# Altium PCB CSP - potentiometers.PcbDoc
Units mm, origin at the board's own origin, x right, y up, seen from the top; angles counter-clockwise.
Board outline 39.12 x 36.32 mm, 2 copper layers (Top Layer, Bottom Layer); 38 components, 22 nets, 85 pads, 0 vias.
Unrouted connection lines stored in the file: 1.
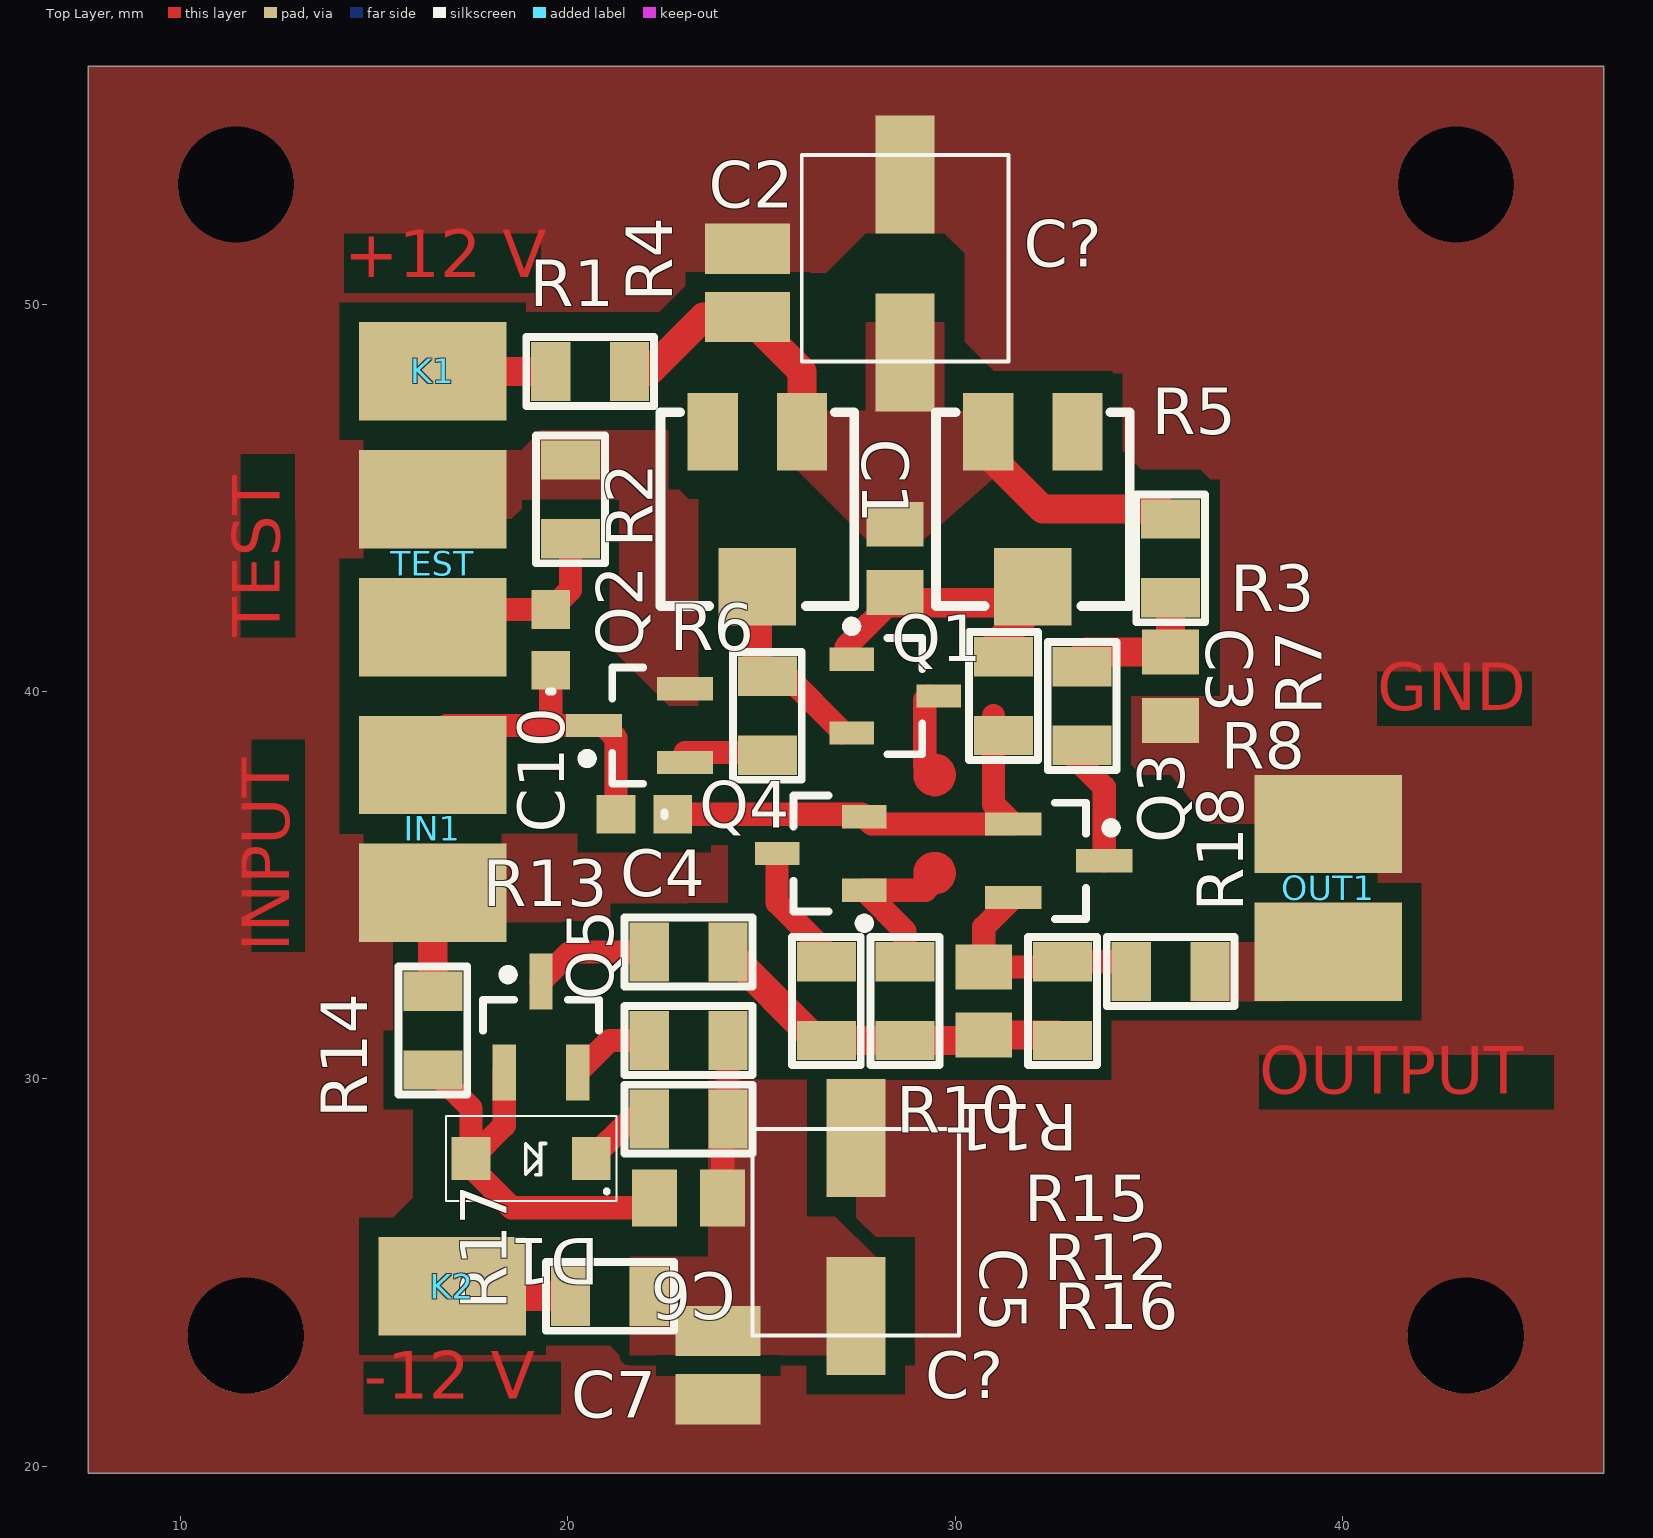
[diagram p0: Top Layer view]
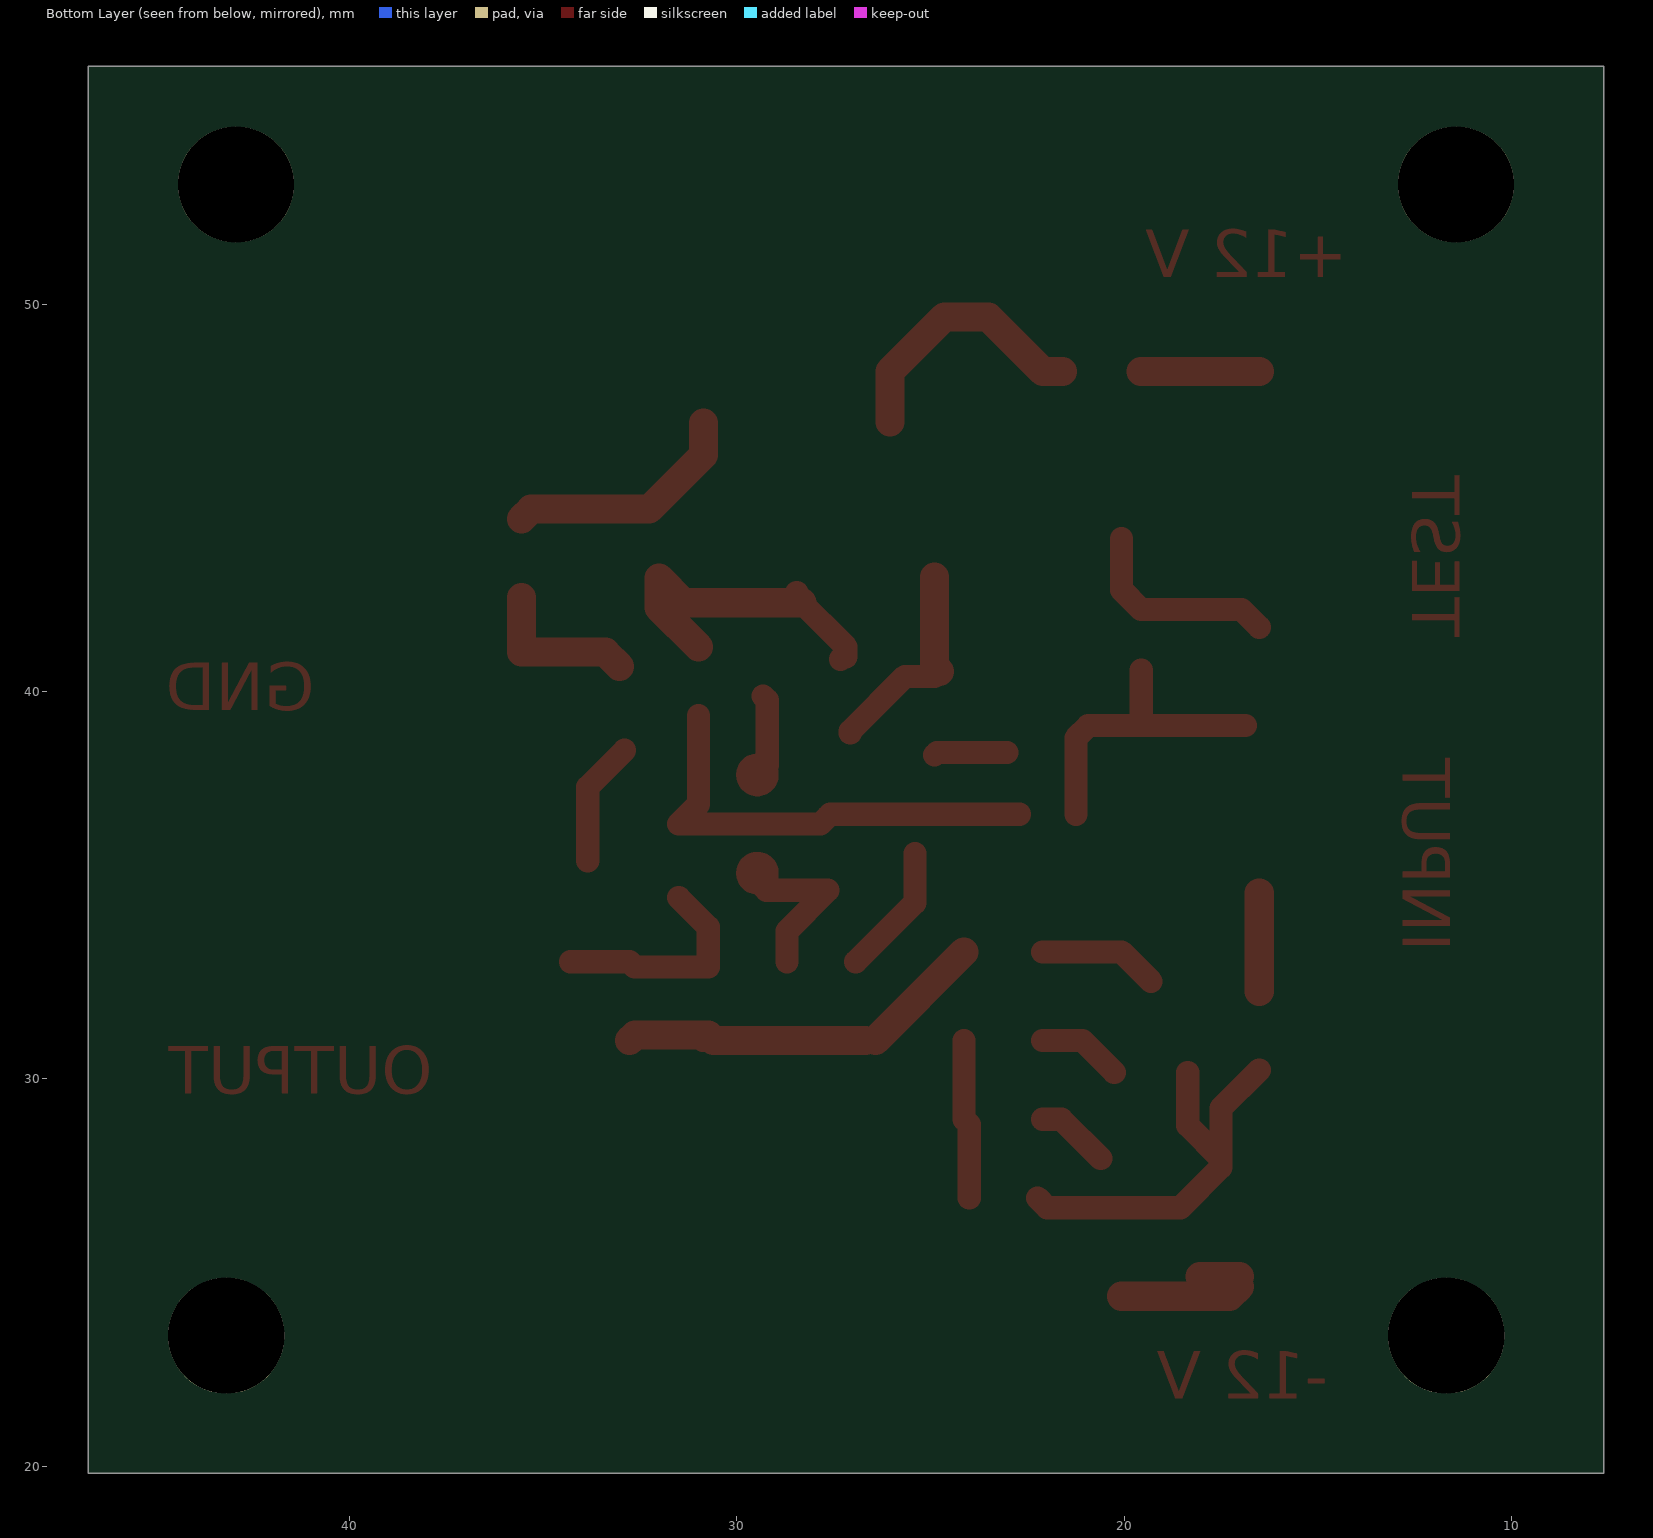
[diagram p1: Bottom Layer view, seen from below]
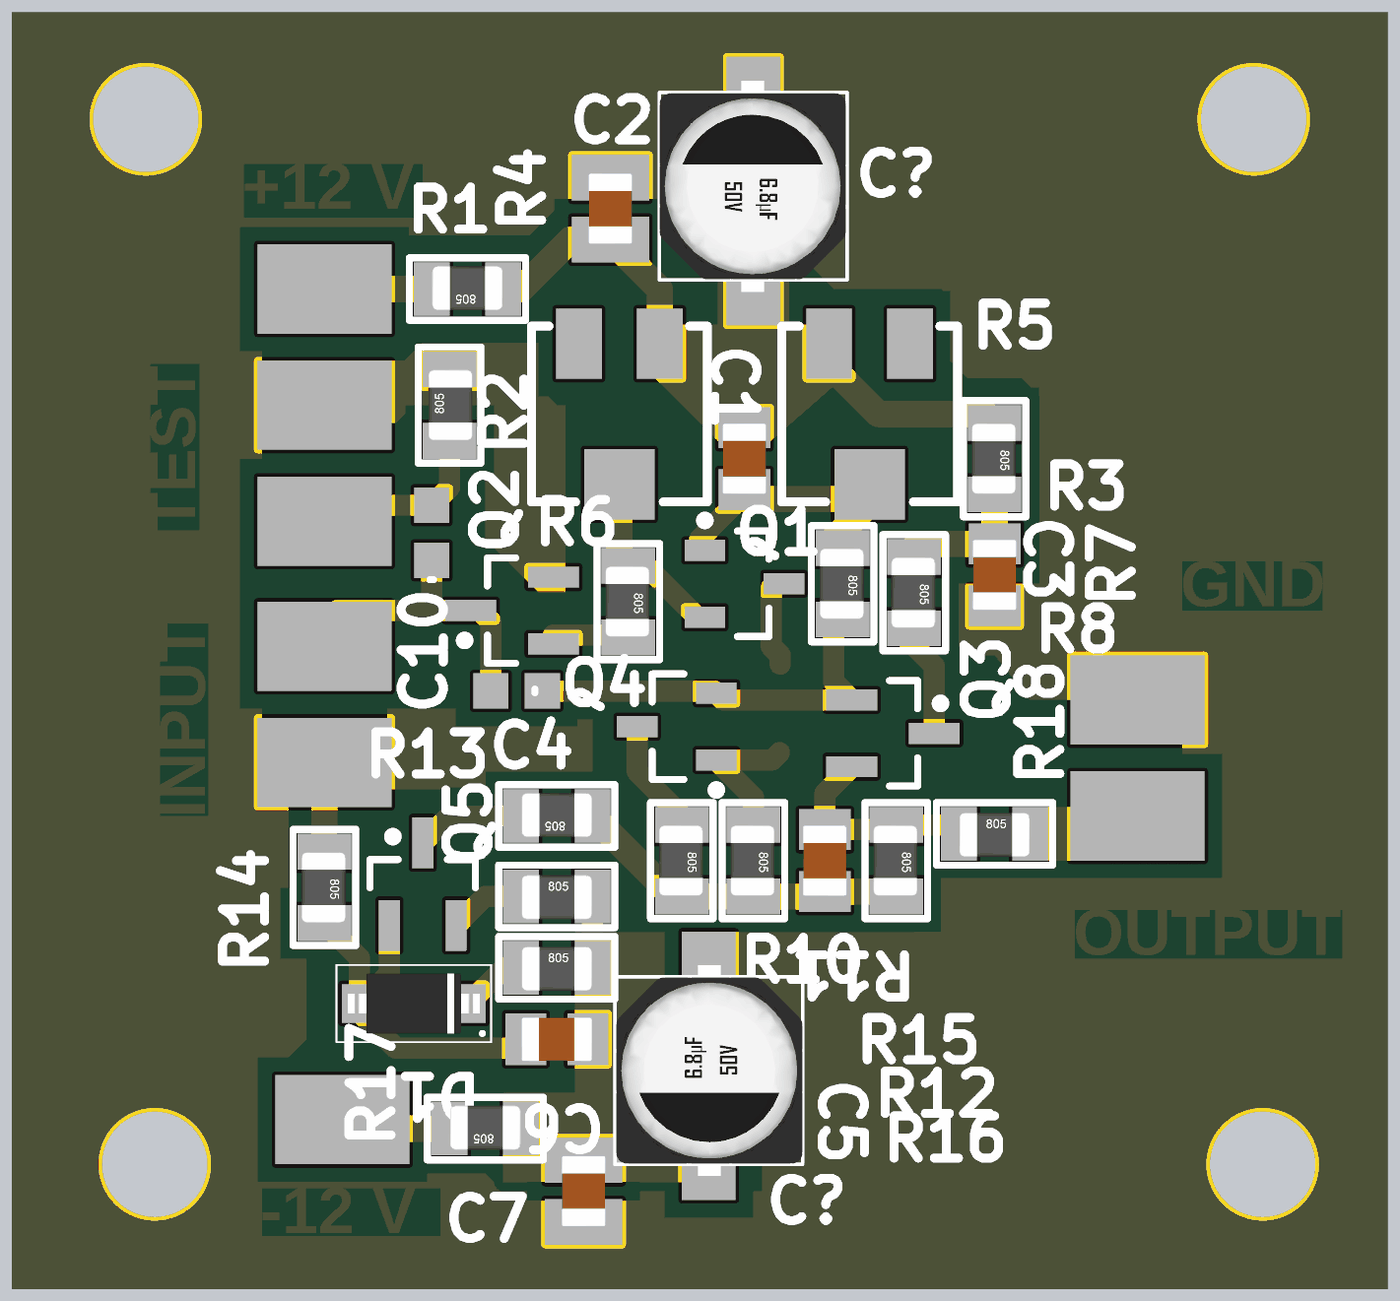
[diagram p2: 3D render of the assembled board from above, using the file's embedded part models]

## Layer stack, top to bottom
Top Solder: solder mask 0.0102, Solder Resist, Dk 3.5
Top Layer: signal copper 0.0356
Dielectric 1: dielectric 0.32, FR-4, Dk 4.8
Bottom Layer: signal copper 0.0356
Bottom Solder: solder mask 0.0102, Solder Resist, Dk 3.5

## Board outline
7.62,19.812 46.736,19.812 46.736,56.134 7.62,56.134

## Design rules (kind name [scope] priority, off if disabled: settings)
Clearance [All] p1: gap=0.254 ignorepadtopadclearanceinfootprint=FALSE except(0: Arc-Hole Track-Hole SMDPad-Hole THPad-Hole Via-Hole Fill-Hole Poly-Text Poly-Hole Region-Hole Text-Hole; 0.3: Arc-Arc Arc-Track Arc-SMDPad Arc-THPad Arc-Via Arc-Fill Arc-Poly Arc-Region Arc-Text Track-Track Track-SMDPad Track-THPad Track-Via Track-Fill Track-Region Track-Text; 0.5: Track-Poly SMDPad-Poly)
PlaneConnect [All] p1: planeconnectstyle=Direct reliefexpansion=0.508 reliefentries=4 reliefconductorwidth=0.254 reliefairgap=0.254
PolygonConnect [All] p1: connectstyle=Direct reliefconductorwidth=0.254 reliefentries=4 polygonreliefangle="90 Angle" airgapwidth=0.254
RoutingVias [All] p1: holewidth=0.711 width=1.27 viastyle="Through Hole" minholewidth=0.711 minwidth=1.27 maxholewidth=0.711 maxwidth=1.27
SolderMaskExpansion [All] p1: expansion=0.102 istentingtop=FALSE
Width [All] p1: maxlimit=1 minlimit=0.254 preferedwidth=0.6 toplayer_minwidth=0.5 bottomlayer_maxwidth=0.254 bottomlayer_prefwidth=0.254 minimp=50.000000 maximp=50.000000 favimp=50.000000
29 further rules are at their usual default settings.

## Components (designator, comment, footprint, x,y, rotation, side; value= is the part's Value field where it differs from the comment)
C1 "Cap" *CAPC2012X94N#1 28.448,43.434 r90 top value=1uF
C2 "Cap" *CAPC2012X94N#2 24.638,50.546 r270 top value=0.1uF
C3 "Cap" *CAPC2012X94N#1 35.56,40.132 r90 top value=1uF
C4 "Cap" 0603#1 21.59,36.83 r180 top value=0.3pF
C5 "Cap" *CAPC2012X94N#1 30.734,32.004 r90 top value=1uF
C6 "Cap" *CAPC2012X94N#1 23.114,26.924 r180 top value=0.01uF
C7 "Cap" *CAPC2012X94N#2 23.876,22.606 r270 top value=0.1uF
C10 "Cap" 0603#2 19.558,40.894 r90 top value=0.3pF
C? "22uF 16V" 5x5.5 27.432,26.162 r90 top
C? "22uF 16V" 5x5.5 28.702,51.054 r270 top
D1 "Diode" SODFL350X110-2N 19.05,27.94 r180 top
IN1 "INPUT" IN/OUT 16.51,38.1 r0 top
K1 "+12V" PAD 16.51,48.26 r0 top
K2 "-12V" PAD 17.018,24.638 r0 top
OUT1 "OUTPUT" IN/OUT 39.624,33.274 r180 top
Q1 "PNP" SOT-23B_N 28.448,39.878 r0 top
Q2 "JFET-N" SOT23_M 21.844,39.116 r180 top
Q3 "2N3904 NPN" SOT23_M 32.671,35.626 r0 top
Q4 "2N3906 PNP" SOT-23B_N 26.525,35.814 r180 top
Q5 "2N3904 NPN" SOT23_M 19.304,31.337 r90 top
R1 "Res1" SMD-0805-RES 20.574,48.26 r90 top value=51
R2 "Res1" SMD-0805-RES 20.066,44.958 r0 top value=1k
R3 "Res1" SMD-0805-RES 35.56,43.434 r180 top value=33
R4 "RPot SM" POT4MM-2 24.892,44.704 r270 top
R5 "RPot SM" POT4MM-2 32.004,44.704 r270 top
R6 "33" SMD-0805-RES 25.146,39.37 r180 top
R7 "Res1" SMD-0805-RES 31.242,39.878 r180 top value=3K
R8 "Res1" SMD-0805-RES 33.274,39.624 r180 top value=33
R10 "Res1" SMD-0805-RES 28.702,32.004 r180 top value=15k
R11 "Res1" SMD-0805-RES 32.766,32.004 r180 top value=500
R12 "Res1" SMD-0805-RES 26.67,32.004 r180 top value=33
R13 "Res1" SMD-0805-RES 23.114,33.274 r90 top value=33
R14 "Res1" SMD-0805-RES 16.51,31.242 r180 top value=10K
R15 "Res1" SMD-0805-RES 23.114,30.988 r270 top value=100
R16 "Res1" SMD-0805-RES 23.114,28.956 r270 top value=1.4k
R17 "Res1" SMD-0805-RES 21.082,24.384 r90 top value=51
R18 "Res1" SMD-0805-RES 35.56,32.766 r270 top value=51
TEST "INPUT" IN/OUT 16.51,41.656 r180 top

## Footprints (in the part's own frame and the unit in brackets; to place one, negate y for a bottom-side part, rotate by r counter-clockwise, add the part's x,y. Pads: shape width x height; smd on the part's side, far side on the other; paste and mask are expansions set on the pad)
5x5.5 [mil]
  rect 120x60 smd: +(90.67,0) -(-90,0)
  silkscreen extent -110,-105 100,105, body extent -123,-105 113,104, height 219
0603#1 [mm] "Chip Inductor, Body 0.6x0.3mm, IPC High Density"
  rect 1x1 smd: 1(-1.112,0) 2(0.35,0)
  silkscreen extent -0.9,-0.05 -0.9,0.05, body extent -0.33,-0.18 0.33,0.18, height 0.55
0603#2 [mm] "Chip Inductor, Body 0.6x0.3mm, IPC High Density"
  rect 1x1 smd: 1(-0.35,0) 2(1.218,0)
  silkscreen extent -0.9,-0.05 -0.9,0.05, body extent -0.33,-0.18 0.33,0.18, height 0.55
*CAPC2012X94N#1 [mm]
  rect 1.16x1.47 smd: 1(-0.88,0) 2(0.88,0)
  body extent -1,-0.62 1.01,0.63, height 0.94
*CAPC2012X94N#2 [mm]
  rect 1.3x2.2 smd: 1(-0.88,0) 2(0.88,0)
  body extent -1,-0.62 1.01,0.63, height 0.94
IN/OUT [mil]
  rect 150x100 smd: 1(0,0) 2(0,-130)
PAD [mm]
  rect 3.81x2.54 smd: 1(0,0)
POT4MM-2 [mm] "Square Trimming Potentiometer"
  rect 2x1.3 smd: CCW(-2,-1.15) CW(-2,1.15)
  rect 2x2 smd: W(2,0)
  silkscreen extent -2.5,-2.5 2.5,2.5
SMD-0805-RES [mil]
  rect 60x40 smd: 1(0,40) 2(0,-40)
  silkscreen extent -35,-65 35,65, body extent -24,-39 26,39, height 31
SODFL350X110-2N [mm] "SODFL, 2-Leads, Body 1.70x3.50mm, IPC Medium Density"
  rect 1x1.1 smd: A(1.55,0) C(-1.55,0)
  silkscreen extent -2.2,-1.1 2.2,1.1, body extent -1.87,-0.85 1.88,0.85, height 1.2
SOT23_M [mm] "SOT23, 3-Leads, Body 2.9x1.3mm, Pitch 0.95mm, Lead Span 2.3mm - Reverse Pinning, IPC Low Density"
  rect 1.45x0.6 smd: 1(1.175,0) 2(-1.175,-0.95) 3(-1.175,0.95)
  silkscreen extent -0.1,-1.5 1.47,1.5, body extent -0.7,-1.5 0.7,1.5, height 1.1
SOT-23B_N [mm] "SOT23, 3-Leads, Body 2.9x1.3mm, Pitch 0.95mm, Lead Span 2.4mm, IPC Medium Density"
  rect 1.15x0.6 smd: 1(-1.125,0.95) 2(-1.125,-0.95) 3(1.125,0)
  silkscreen extent -1.25,-1.5 0.7,1.92, body extent -0.7,-1.5 0.7,1.5, height 1.14

## Part data
C1 C2 C3 C4 C5 C6 C7 C10: "Capacitor", LatestRevisionDate=17-Jul-2002, LatestRevisionNote="Re-released for DXP Platform.", PackageDescription="Radial Cap, Thru-Hole; 2 Leads; 0.3 in Pin Spacing", PackageReference=RAD-0.3, Published=8-Jun-2000, Publisher="Altium Limited"
C? C?: "Capacitor Polarised", Manufacturer_Name=Panasonic, Manufacturer_Part_Number=EEE-TG1H470UP, Datasheet Link=https://industrial.panasonic.com/cdbs/www-data/pdf/RDE0000/ABA0000C1187.pdf, Height=10.5mm
Q1: "PNP Bipolar Transistor", LatestRevisionDate=29-May-2009, LatestRevisionNote="IPC-7351 Footprint Added.", PackageDescription="3-Pin SOT-23 Package 0.95 mm Pitch, 2.4 mm Lead Span", PackageReference=SOT-23B, PackageVersion=Aug-1999, Published=8-Jun-2000, Publisher="Altium Limited"
Q2: "N-Channel JFET", Code_JEDEC=TO-254-AA, LatestRevisionDate=17-Jul-2002, LatestRevisionNote="Re-released for DXP Platform.", PackageReference=TO-254-AA, Published=8-Jun-2000, Publisher="Altium Limited"
Q3 Q5: library part NPN, "NPN Bipolar Transistor", Code_JEDEC=TO-226-AA, LatestRevisionDate=17-Jul-2002, LatestRevisionNote="Re-released for DXP Platform.", PackageDescription="TO, Flat Index; 3 In-Line, Axial Leads; Body Dia. 4.8mm; Leads 0.55 x 0.51 mm (max)", PackageReference=TO-226-AA, Published=8-Jun-2000, Publisher="Altium Limited"
Q4: library part PNP, "PNP Bipolar Transistor", LatestRevisionDate=29-May-2009, LatestRevisionNote="IPC-7351 Footprint Added.", PackageDescription="3-Pin SOT-23 Package 0.95 mm Pitch, 2.4 mm Lead Span", PackageReference=SOT-23B, PackageVersion=Aug-1999, Published=8-Jun-2000, Publisher="Altium Limited"
R1 R2 R3 R7 R8 R10 R11 R12 R13 R14 R15 R16 R17 R18: "Resistor", LatestRevisionDate=17-Jul-2002, LatestRevisionNote="Re-released for DXP Platform.", PackageDescription="Axial Device, Thru-Hole; 2 Leads; 0.3 in Pin Spacing", PackageReference=AXIAL-0.3, Published=8-Jun-2000, Publisher="Altium Limited"
R4 R5: "Square Trimming Potentiometer", ComponentLink1Description="Manufacturer Link", ComponentLink1URL=http://bourns.com/2/search.html, DatasheetVersion=Oct-2003, PackageDescription="Square Trimming Potentiometer", PackageReference=POT4MM-2, Published=17-Dec-2003, Publisher="Altium Limited"
R6: library part Res1, "Resistor", LatestRevisionDate=17-Jul-2002, LatestRevisionNote="Re-released for DXP Platform.", PackageDescription="Axial Device, Thru-Hole; 2 Leads; 0.3 in Pin Spacing", PackageReference=AXIAL-0.3, Published=8-Jun-2000, Publisher="Altium Limited"

## Free pads (board coordinates)
  round 3 hole 3: 0(11.43,53.086) 0(11.684,23.368) 0(42.926,53.086) 0(43.18,23.368)

## Nets (pads, with @x,y where several pads share a name; then routed paths per layer and width w, separated by ;. In a path a pad name is that pad's centre, name@x,y a point inside that pad or via, vN(x,y) a via of type N, cw(c..) or ccw(c..) an arc to the next point about the centre after c; other vN are vias at no path point)
GND: C2.1 C3.1 C7.2 C?.+@27.432,28.465 C?.-@28.702,53.34 IN1.2 OUT1.2 pad.0 Q2.2 R2.1 R14.2 TEST.2 | length 2.5
  Top Layer w0.75: R14.2 IN1.2
NetC1_1: C1.1 Q1.1 R5.W R7.2 | length 8.5
  Top Layer w0.6: Q1.1 27.257,40.894 27.178,40.894 27.178,41.148 28.448,42.418 C1.1
  Top Layer w0.75: C1.1@28.318,42.288 31.366,42.288 32.004,42.926 32.004,42.164 R7.2@30.988,41.148
NetC1_2: C1.2 C2.2 C?.+@28.702,48.751 R1.2 R3.2 R4.CW R5.CCW | length 13.1
  Top Layer w0.75: R1.2 22.098,48.26 23.504,49.666 C2.2 26.042,48.262 R4.CW@26.042,46.958 ; R5.CCW@30.854,46.926 30.854,46.108 32.258,44.704 35.306,44.704 R3.2
NetC3_2: C3.2 R3.1 R8.2 | length 4.1
  Top Layer w0.75: R8.2@33.02,40.64 33.392,41.012 C3.2 R3.1
NetC4_1: C4.1 Q3.3 Q4.2 R7.1 | length 11.9
  Top Layer w0.6: C4.1 27.584,36.83 Q4.2 27.838,36.576 Q3.3 30.988,37.084 30.988,39.37
NetC4_2: C4.2 C10.1 IN1.1 Q2.1 | length 7.9
  Top Layer w0.6: IN1.1@16.87,39.116 19.558,39.116 ; C10.1 19.558,39.116 ; C4.2 21.24,38.799 20.923,39.116 Q2.1 19.558,39.116
NetC5_1: C5.1 R10.1 R11.1 R12.1 R13.2 | length 9.9
  Top Layer w0.6: R12.1@26.416,30.988 R12.1 ; C5.1@30.598,30.988 C5.1 C5.1@30.87,30.988
  Top Layer w0.75: R13.2 R12.1@26.416,30.988 ; R12.1 R10.1 C5.1@30.598,30.988 ; C5.1 32.63,31.124 R11.1
NetC5_2: C5.2 Q3.2 R11.2 R18.2 | length 5.7
  Top Layer w0.6: Q3.2 30.734,33.914 C5.2 32.63,32.884 R11.2 R18.2@34.29,33.02
NetC6_1: C6.1 C7.1 C?.-@27.432,23.876 R15.1 R16.1 R17.2 | length 4.1
  Top Layer w0.6: C6.1 23.994,28.82 R16.1 R15.1
NetC6_2: C6.2 D1.A Q5.3 R14.1 | length 10.8
  Top Layer w0.6: R14.1 17.5,29.236 D1.A ; Q5.3 18.354,28.794 D1.A ; C6.2 21.98,26.67 18.542,26.67 17.5,27.712 D1.A
NetC10_2: C10.2 R2.2 TEST.1 | length 5.3
  Top Layer w0.6: TEST.1 16.966,42.112 C10.2 20.066,42.62 R2.2
NetD1_C: D1.C R16.2 | length 1.9
  Top Layer w0.6: D1.C 21.616,28.956 R16.2
NetK1_1: K1.1 R1.1 | length 3
  Top Layer w0.75: K1.1 R1.1
NetK2_1: K2.1 R17.1 | length 4.2
  Top Layer w0.75: K2.1 17.272,24.384 R17.1 ; K2.1@17.018,24.892 K2.1@18.034,24.892
NetOUT1_1: OUT1.1 R18.1
NetQ1_2: Q1.2 R4.W R6.2 | length 5.7
  Top Layer w0.6: R6.2@24.765,40.513 24.892,40.386 R6.2@25.357,40.386 ; R6.2 25.654,40.386 27.069,38.971 Q1.2@27.069,38.928
  Top Layer w0.75: R6.2@24.765,40.513 24.892,40.64 R4.W@24.892,42.958
NetQ1_3: Q1.3 Q4.1 R10.2 | length 10.4
  Top Layer w0.5: 29.764,35.306 ccw(c29.464,35.306) 29.764,35.306 ; 29.764,37.846 ccw(c29.464,37.846) 29.764,37.846
  Top Layer w0.6: R10.2 28.702,33.812 Q4.1 29.228,34.864 29.441,35.076 ; Q1.3@29.319,39.878 29.21,39.769 29.21,38.1 29.252,38.058 29.464,37.846 29.464,37.592
NetQ2_3: Q2.3 R6.1 | length 1.9
  Top Layer w0.6: Q2.3@23.019,38.42 24.826,38.42 R6.1@24.892,38.354
NetQ3_1: Q3.1 R8.1 | length 3.2
  Top Layer w0.6: R8.1@32.893,38.481 33.846,37.528 Q3.1
NetQ4_3: Q4.3 R12.2 | length 3.4
  Top Layer w0.6: Q4.3 25.4,34.544 R12.2@26.924,33.02
NetQ5_1: Q5.1 R13.1 | length 3.1
  Top Layer w0.6: Q5.1 20.066,33.274 R13.1
NetQ5_2: Q5.2 R15.2 | length 2.2
  Top Layer w0.6: Q5.2 21.08,30.988 R15.2
pads on no net: R4.CCW R5.CW

## Polygon pours and split planes (outlines as drawn)
GND on Top Layer "Top Layer-GND" (solid, pour order 20): 21.082,41.148 22.606,39.624 23.368,39.624 23.368,44.958 23.114,44.958 22.606,45.466 22.606,46.736 19.304,46.736 18.796,46.228 12.578,46.228 12.578,44.45 18.542,44.45 19.05,44.958 21.082,44.958
GND on Top Layer "GND_L01_P019" (solid, pour order 19): 14.732,35.052 14.732,49.784 22.352,49.784 23.368,50.8 26.67,50.8 27.686,51.816 29.718,51.816 30.226,51.308 30.226,49.022 30.988,48.26 34.036,48.26 34.29,48.006 34.29,46.228 34.798,45.72 36.322,45.72 36.83,45.212 36.83,37.084 40.894,37.084 40.894,32.004 33.782,32.004 33.782,30.48 33.274,29.972 27.432,29.972 27.432,26.416 27.94,25.908 28.956,25.908 28.956,22.606 21.59,22.606 21.082,23.114 14.986,23.114 14.986,25.908 16.002,26.924 16.002,29.21 15.494,29.718 15.494,35.052 7.62,35.052 7.62,19.812 46.736,19.812 46.736,56.134 7.62,56.134 7.62,35.052
no net on Top Layer "NONET_L01_P018" (solid, pour order 18): 18.288,34.798
no net on Top Layer "NONET_L01_P017" (solid, pour order 17): 18.288,35.179
NetC1_2 on Top Layer "NETC1_2_L01_P014" (solid, pour order 14): 27.686,49.53 27.686,46.482 29.718,46.482 29.718,49.53
NetC1_2 on Top Layer "NETC1_2_L01_P013" (solid, pour order 13): 25.908,47.244 25.908,45.72 27.686,43.942 29.21,43.942 31.242,45.72 31.242,47.244
NetC6_1 on Top Layer "NETC6_1_L01_P012" (solid, pour order 12): 21.59,25.4 21.59,22.86 27.94,22.86 27.94,25.4 26.67,26.67 26.67,29.972 23.622,29.972 23.622,25.4
GND on Top Layer "GND" (solid, pour order 11): 18.796,36.33 18.804,36.322 24.13,36.322 24.13,34.036 18.288,34.036 18.288,36.322
no net on Top Layer "NONET_L01_P008" (solid, pour order 8): 25.908,101.346
NetOUT1_1 on Top Layer "NETOUT1_1_L01_P002" (solid, pour order 2): 36.195,33.528 36.195,32.004 38.481,32.004 38.481,33.528
no net on Top Layer "NONET_L01_P003" (solid, pour order 3): 55.88,85.852
GND on Top Layer "GND_L01_P001" (solid, pour order 1): 34.544,39.878 34.544,38.1 34.798,37.846 35.56,37.846 36.576,36.576 40.386,36.576 40.386,39.878
no net on Top Layer "NONET_L01_P000" (solid, pour order 0): 47.244,93.98

## Other copper
Top Layer:
  text "+12 V" at 14.224,50.292 h2.1
  text "TEST" at 12.954,41.402 h2.1 r90
  text "GND" at 40.894,39.116 h2.1
  text "INPUT" at 13.208,33.274 h2.1 r90
  text "OUTPUT" at 37.846,29.21 h2.1
  text "-12 V" at 14.732,21.336 h2.1

## Silkscreen, mask and mechanical layers (free items; w line width, h text height)
Mechanical 1:
  lines w0.3: 8.636,20.828 8.636,55.118 45.72,55.118 45.72,20.828 8.636,20.828